# Altium PCB miniquad_713.PcbDoc
Units mm, origin at the board's own origin, x right, y up, seen from the top; angles counter-clockwise.
Board outline 67.26 x 88.15 mm, 2 copper layers (Top Layer, Bottom Layer); 40 components, 31 nets, 163 pads, 39 vias.
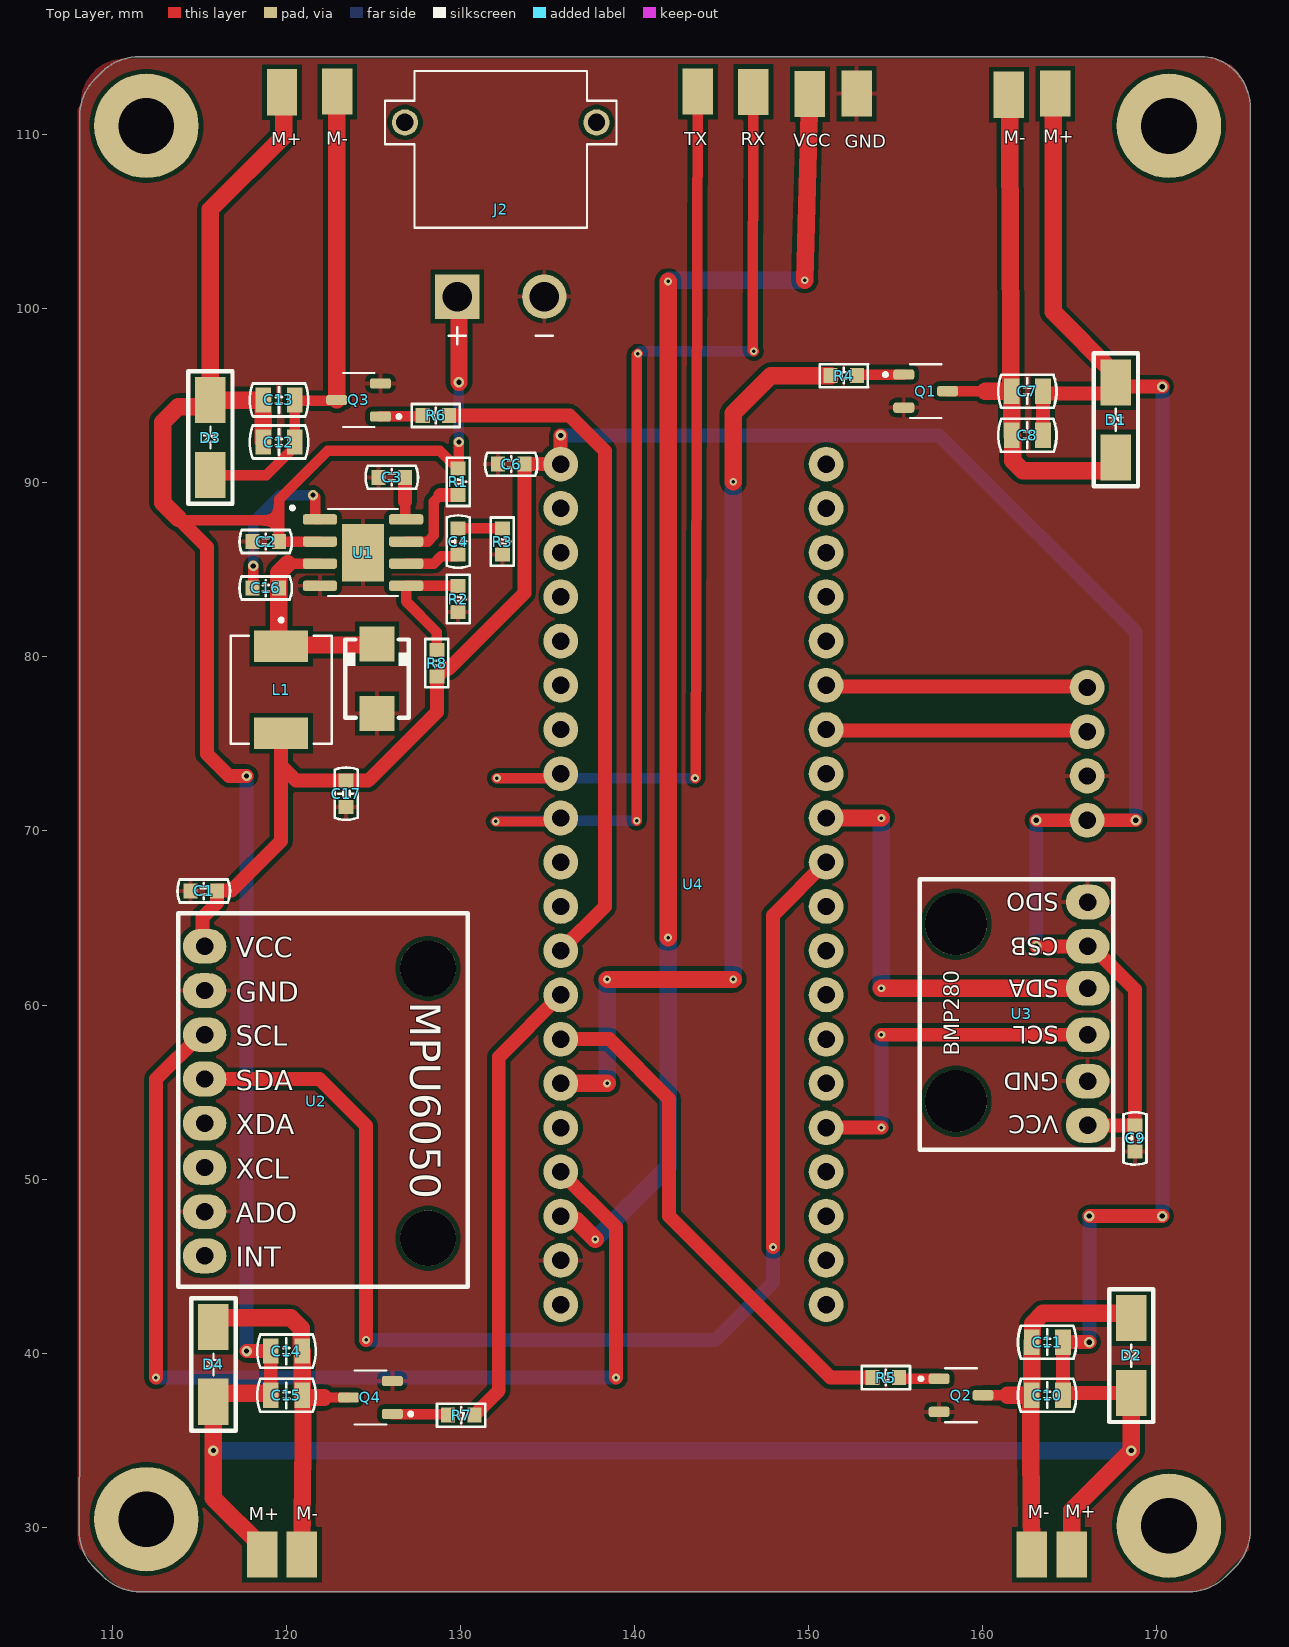
[diagram p0: Top Layer view]
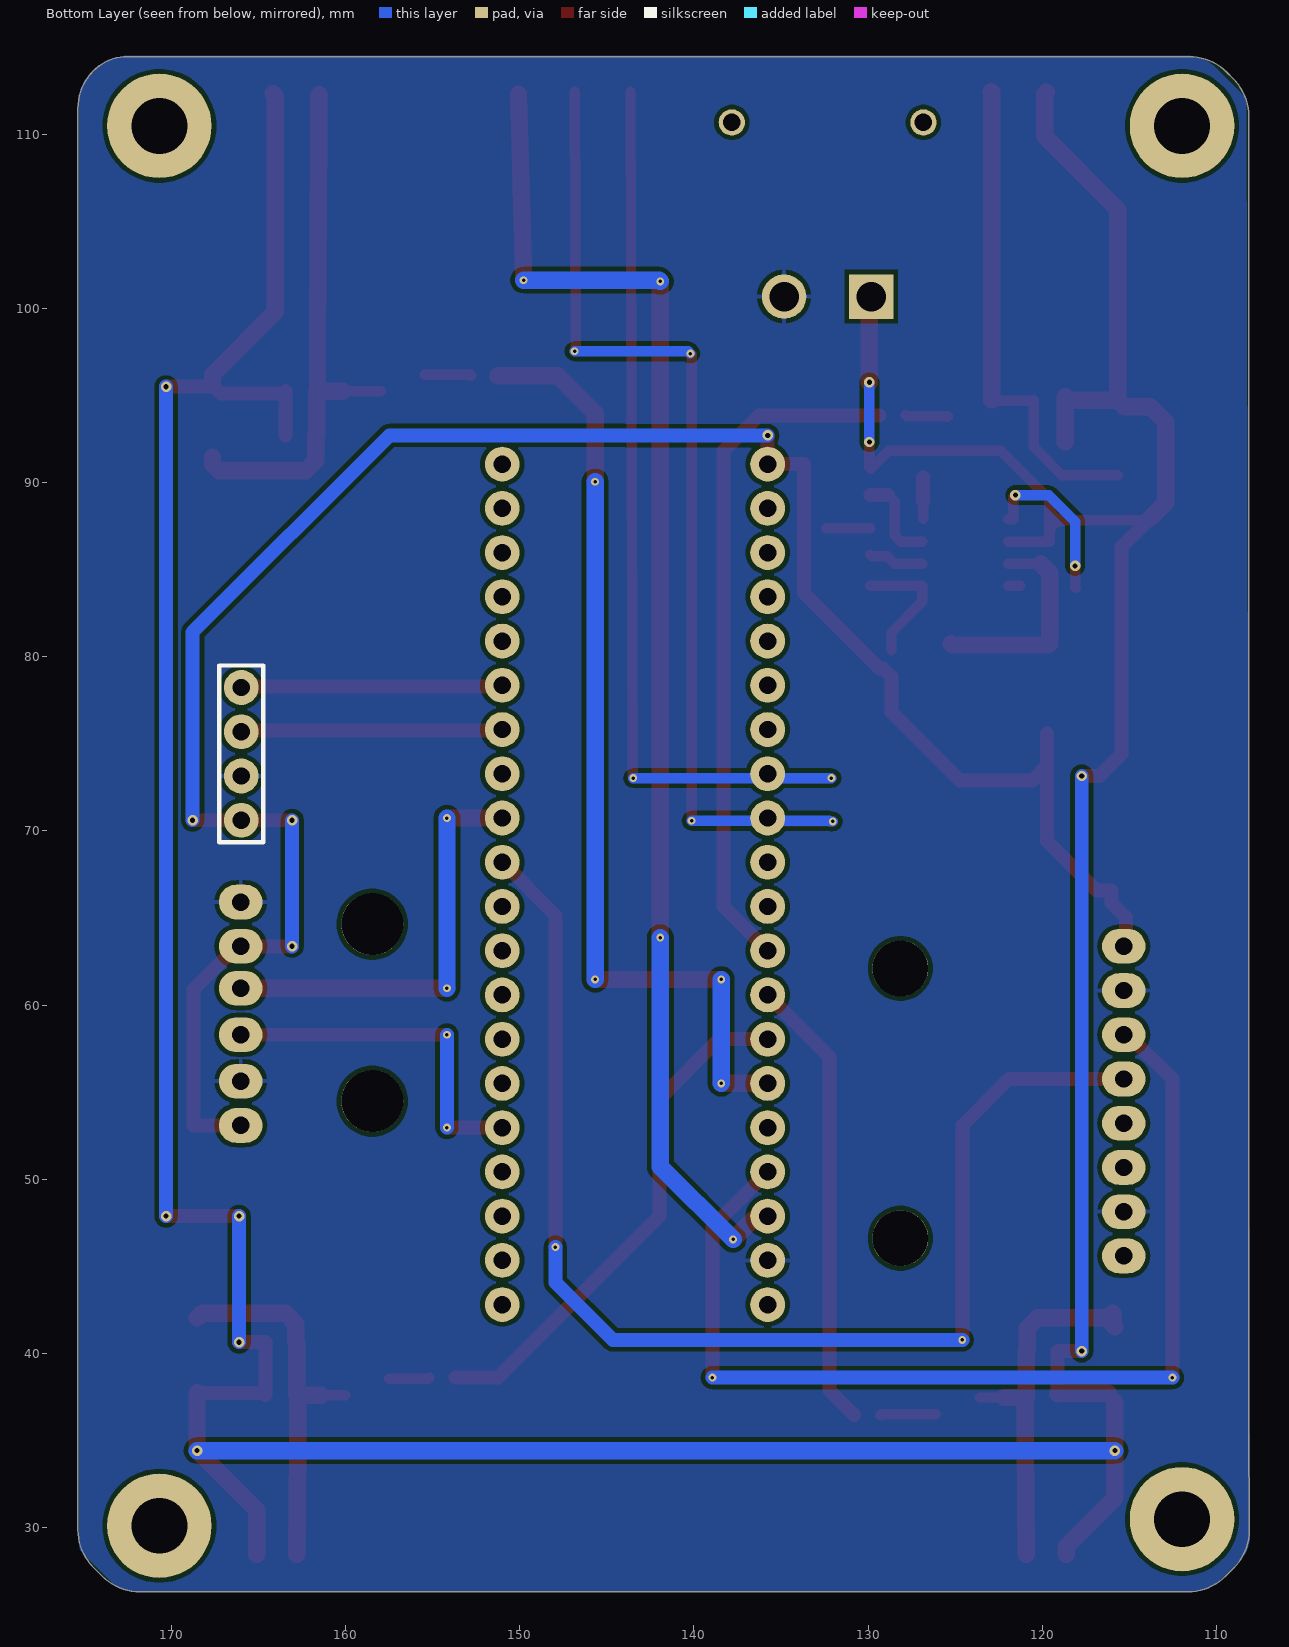
[diagram p1: Bottom Layer view, seen from below]
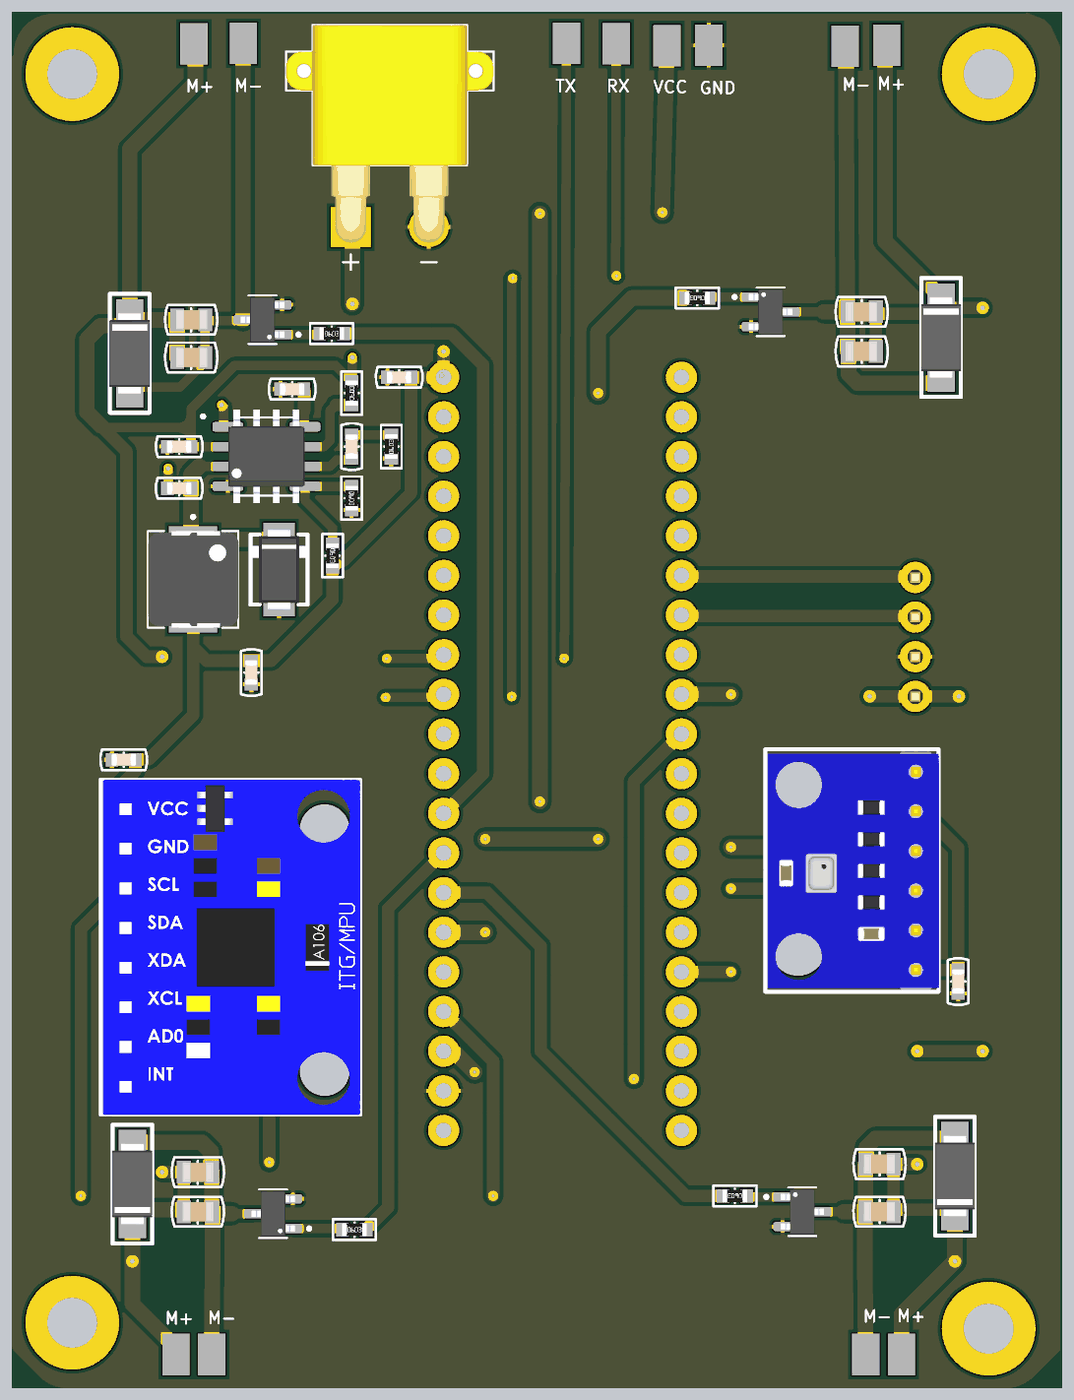
[diagram p2: 3D render of the assembled board from above, using the file's embedded part models]

## Layer stack, top to bottom
Top Solder: solder mask 0.0102, Solder Resist, Dk 3.5
Top Layer: signal copper 0.0356
Dielectric 1: dielectric 0.32, FR-4, Dk 4.8
Bottom Layer: signal copper 0.0356
Bottom Solder: solder mask 0.0102, Solder Resist, Dk 3.5

## Board outline
108.11,29.83 108.11,32.86 108.14,32.932 108.14,111.03 cw(c111.206,111.03) 109.038,113.198 109.402,113.562 cw(c111.57,111.394) 111.57,114.46 172.512,114.46 cw(c172.512,111.688) 174.472,113.648 cw(c172.304,111.48) 175.37,111.48 175.37,29.87 cw(c172.304,29.87) 174.472,27.702 173.978,27.208 cw(c171.81,29.376) 171.81,26.31 111.63,26.31 cw(c111.63,29.376) 109.462,27.208 109.008,27.662 cw(c111.176,29.83)

## Design rules (kind name [scope] priority, off if disabled: settings)
Clearance [All] p1: gap=0.254 ignorepadtopadclearanceinfootprint=FALSE
PolygonConnect [All] p1: connectstyle=Relief reliefconductorwidth=0.254 reliefentries=4 polygonreliefangle="90 Angle" airgapwidth=0.254
RoutingVias [All] p1: holewidth=0.2 width=0.45 viastyle="Through Hole" minholewidth=0.2 minwidth=0.45 maxholewidth=0.2 maxwidth=0.45
SolderMaskExpansion [All] p1: expansion=0.102 istentingtop=FALSE
Width [All] p1: maxlimit=1.2 minlimit=0.254 preferedwidth=0.254
30 further rules are at their usual default settings.

## Components (designator, comment, footprint, x,y, rotation, side; value= is the part's Value field where it differs from the comment)
C1 "100nF" "CAPACITOR 0603" 115.268,66.548 r0 top
C2 "10uF/25V" "CAPACITOR 0603" 118.824,86.614 r180 top
C3 "0.1uF" "CAPACITOR 0603" 126.063,90.297 r180 top
C4 "3.9nF" "CAPACITOR 0603" 129.873,86.614 r90 top
C6 "100nF" "CAPACITOR 0603" 132.921,91.059 r180 top
C7 "100nF" "CAPACITOR 0805" 162.56,95.25 r0 top
C8 "47uF" "CAPACITOR 0805" 162.56,92.71 r0 top
C9 "100nF" "CAPACITOR 0603" 168.74,52.34 r90 top
C10 "100nF" "CAPACITOR 0805" 163.703,37.592 r0 top
C11 "47uF" "CAPACITOR 0805" 163.703,40.64 r0 top
C12 "100nF" "CAPACITOR 0805" 119.586,92.329 r180 top
C13 "47uF" "CAPACITOR 0805" 119.586,94.742 r180 top
C14 "100nF" "CAPACITOR 0805" 120.015,40.132 r180 top
C15 "47uF" "CAPACITOR 0805" 120.015,37.592 r180 top
C16 "10nF" "CAPACITOR 0603" 118.824,83.947 r0 top
C17 "22uF/6.3V" "CAPACITOR 0603" 123.444,72.136 r90 top
D1 "SS14" DIODE_SMA 167.64,93.599 r0 top
D2 "SS14" DIODE_SMA 168.529,39.878 r180 top
D3 "SS14" DIODE_SMA 115.649,92.583 r0 top
D4 "SS14" DIODE_SMA 115.824,39.37 r180 top
J1 "B130" SMA 125.222,78.74 r270 top
J2 "XT30PW-M" AMASS_XT30PW-M 132.32,110.68 r0 top
J3 "MALE-2.54-4P" MALE-2.54-4P 165.989,74.422 r180 bottom
L1 "10uH/4A" "CUON CAM SMD 0530" 119.713,78.105 r270 top
Q1 "AO3400A" SOT95P280X125-3N 156.718,95.25 r0 top
Q2 "AO3400A" SOT95P280X125-3N 158.75,37.592 r0 top
Q3 "AO3400A" SOT95P280X125-3N 124.158,94.742 r180 top
Q4 "AO3400A" SOT95P280X125-3N 124.841,37.465 r180 top
R1 "100K" RESISTOR_0603 129.873,90.043 r90 top
R2 "10K 1%" RESISTOR_0603 129.873,83.312 r270 top
R3 "6.8K" RESISTOR_0603 132.413,86.614 r90 top
R4 "100" RESISTOR_0603 152.019,96.139 r180 top
R5 "100" RESISTOR_0603 154.432,38.608 r180 top
R6 "100" RESISTOR_0603 128.594,93.853 r0 top
R7 "100" RESISTOR_0603 130.048,36.449 r0 top
R8 "26.1K 1%" RESISTOR_0603 128.651,79.629 r270 top
U1 "MP2307DN-LF-Z" SOIC127P600X170-9N 124.412,85.979 r0 top
U2 "MPU6050" MPU6050 122.11,54.546 r270 top
U3 "BMP280" BMP280 161.925,59.436 r90 top
U4 "STM32F411CEU6" STM32F411CEU6 135.763,65.659 r180 top

## Footprints (in the part's own frame and the unit in brackets; to place one, negate y for a bottom-side part, rotate by r counter-clockwise, add the part's x,y. Pads: shape width x height; smd on the part's side, far side on the other; paste and mask are expansions set on the pad)
AMASS_XT30PW-M [mm]
  round 2.55 hole 1.7: N(2.5,-10)
  rect 2.55x2.55 / inner round 2.55 / far side rect 2.55x2.55 hole 1.7: P(-2.5,-10)
  round 1.508 hole 1: S1(5.5,0) S2(-5.5,0)
  silkscreen extent -6.65,-12.75 6.65,2.95, body extent -6.65,-11 6.65,2.95, height 5
BMP280 [mm] "SENSOR ATMOSPHERIC PRESSURE/TEMPERATURE/ALTITUDE"
  oval 2x2.5 hole 1: 1(-6.35,-4.096) 2(-3.81,-4.096) 3(-1.143,-4.096) 4(1.524,-4.096) 5(3.937,-4.096) 6(6.477,-4.096)
  round 3.556 hole 3.556 unplated: ""(-4.953,3.461) ""(5.207,3.461)
  silkscreen extent -7.75,-5.56 7.78,5.56, body extent -7.62,-5.6 7.62,5.4, height 6.07
"CAPACITOR 0603" [mm]
  rect 0.806x0.864 smd: 1(-0.753,0) 2(0.753,0)
  silkscreen extent -1.5,-0.66 1.5,0.66, body extent -0.79,-0.4 0.81,0.4, height 0.81
"CAPACITOR 0805" [mm]
  rect 0.9x1.45 smd: 1(-0.9,0) 2(0.9,0)
  silkscreen extent -1.68,-0.95 1.67,0.95, body extent -1.03,-0.62 0.97,0.63, height 0.61
"CUON CAM SMD 0530" [mm] "CUON CAM SMD 0530"
  rect 1.8x3.1 smd: 1(-2.5,0) 2(2.5,0)
  silkscreen extent -4.1,-2.9 3.1,2.9, body extent -3.1,-2.88 3.1,2.92, height 3
DIODE_SMA [mm] "Diode SMA"
  rect 1.75x2.65 smd: 1(0,-2.15) 2(0,2.15)
  silkscreen extent -1.27,-3.8 1.27,3.82, body extent -1.3,-2.6 1.3,2.6, height 2.2
MALE-2.54-4P [mm]
  round 2 hole 1: 1(0,-3.81) 2(0,-1.27) 3(0,1.27) 4(0,3.81)
  silkscreen extent -1.27,-5.08 1.27,5.07, body extent -1.21,-5.09 1.19,5.07, height 8.36
MPU6050 [mm] "IMU ACCEL/GYRO 3-AXIS I2C"
  oval 2x2.5 hole 1: 1(-8.826,-6.794) 2(-6.286,-6.794) 3(-3.746,-6.794) 4(-1.206,-6.794) 5(1.334,-6.794) 6(3.874,-6.794) 7(6.414,-6.794) 8(8.954,-6.794)
  round 3.2 hole 3.2 unplated: ""(-7.557,6.033) ""(7.937,6.033)
  silkscreen extent -10.73,-8.32 10.73,8.32, body extent -10.73,-8.19 10.77,8.31, height 5.69
RESISTOR_0603 [mm]
  rect 0.806x0.864 smd: 1(-0.753,0) 2(0.753,0)
  silkscreen extent -1.38,-0.66 1.38,0.66, body extent -0.79,-0.4 0.81,0.4, height 0.47
SMA [mm]
  rect 2x2 smd: A(2,0) C(-2,0)
  silkscreen extent -2.25,-1.84 2.25,1.83, body extent -2.6,-1.3 2.6,1.3, height 2.4
SOIC127P600X170-9N [mm]
  rrect50% 1.97x0.6 smd: 1(-2.475,1.905) 2(-2.475,0.635) 3(-2.475,-0.635) 4(-2.475,-1.905) 5(2.475,-1.905) 6(2.475,-0.635) 7(2.475,0.635) 8(2.475,1.905)
  rect 2.41x3.3 smd paste-3: 9(0,0)
  silkscreen extent -4.16,-2.5 2,2.67, body extent -2.45,-3 2.45,3, height 1.7
SOT95P280X125-3N [mm]
  rrect50% 1.21x0.59 smd: 1(-1.255,0.95) 2(-1.255,-0.95) 3(1.255,0)
  silkscreen extent -2.41,-1.55 0.9,1.55, body extent -1.4,-1.45 1.4,1.45, height 1.25
STM32F411CEU6 [mm]
  round 2 hole 1: 41(0,-25.4) 42(0,-22.86) 43(0,-20.32) 44(0,-17.78) 45(0,-15.24) 46(0,-12.7) 47(0,-10.16) 48(0,-7.62) 49(0,-5.08) 50(0,-2.54) 51(0,0) 52(0,2.54) 53(0,5.08) 54(0,7.62) 55(0,10.16) 56(0,12.7) 57(0,15.24) 58(0,17.78) 59(0,20.32) 60(0,22.86) 61(-15.24,22.86) 62(-15.24,20.32) 63(-15.24,17.78) 64(-15.24,15.24) 65(-15.24,12.7) 66(-15.24,10.16) 67(-15.24,7.62) 68(-15.24,5.08) 69(-15.24,2.54) 70(-15.24,0) 71(-15.24,-2.54) 72(-15.24,-5.08) 73(-15.24,-7.62) 74(-15.24,-10.16) 75(-15.24,-12.7) 76(-15.24,-15.24) 77(-15.24,-17.78) 78(-15.24,-20.32) 79(-15.24,-22.86) 80(-15.24,-25.4)

## Part data
C1 C2 C3 C4 C6 C9 C16 C17: library part "CAPACITOR 0603", "Generic Capacitor 0603, 1.6x0.8x0.9mm."
C7 C8 C10 C11 C12 C13 C14 C15: library part "CAPACITOR 0805", "Generic Capacitor 0805, 2x1.25x1.4mm."
D1 D2 D3 D4: "Rectifier Schottky 40V 1A SMA", JLCPCB PN=C2837270, ComponentLink1Description=Datasheet, Digikey PN=SS14-E3/5ATGITR-ND, Mouser PN=512-SS14
J1: library part B130-13-F, "Diode Zener Dual 3.9V 5% 300mW 3Pin", Package="DO-214 Diodes Inc.", Check_prices=https://www.snapeda.com/parts/B130-13-F/Diodes+Inc./view-part/?ref=eda, MF="Diodes Inc.", MP=B130-13-F, SnapEDA_Link=https://www.snapeda.com/parts/B130-13-F/Diodes+Inc./view-part/?ref=snap
J2: "Socket; DC supply; XT30; male; PIN: 2; on PCBs; THT; Colour: yellow", Package=None, Check_prices=https://www.snapeda.com/parts/XT30PW-M/AMASS/view-part/?ref=eda, MF=AMASS, MP=XT30PW-M, SnapEDA_Link=https://www.snapeda.com/parts/XT30PW-M/AMASS/view-part/?ref=snap
J3: "Male Header Connector 2.54mm 4 Pins.", JLCPCB PN=C492403
L1: library part "Cuon Cam SMD 0530", "SMD 0530", Package=None, Availability=Unavailable, MP=FDV0530-H-1R5M=P3, Price=None
Q1 Q2 Q3 Q4: "N-Channel 30 V 5.8A (Ta) 1.4W (Ta) Surface Mount SOT-23", Package=None, Check_prices=https://www.snapeda.com/parts/AO3400A/UMW/view-part/?ref=eda, MF=UMW, MP=AO3400A, SnapEDA_Link=https://www.snapeda.com/parts/AO3400A/UMW/view-part/?ref=snap
R1 R2 R3 R4 R5 R6 R7 R8: library part RESISTOR_0603, "Generic Resistor 0603."
U1: "Buck Switching Regulator IC Positive Adjustable 0.925V 1 Output 3A 8-SOIC (0.154, 3.90mm Width) Exposed Pad", Package="SOIC-8 Monolithic Power", Availability="In Stock", Check_prices=https://www.snapeda.com/parts/MP2307DN-LF-Z/Monolithic+Power+Systems+Inc./view-part/?ref=eda, MF="Monolithic Power", MP=MP2307DN-LF-Z, Price=None, Purchase-URL=https://pricing.snapeda.com/search/part/MP2307DN-LF-Z/?ref=eda, SnapEDA_Link=https://www.snapeda.com/parts/MP2307DN-LF-Z/Monolithic+Power+Systems+Inc./view-part/?ref=snap
U2: "IMU ACCEL/GYRO 3-AXIS I2C", ComponentLink1Description=Datasheet, ComponentLink1URL=https://invensense.tdk.com/wp-content/uploads/2015/02/MPU-6000-Datasheet1.pdf
U3: "SENSOR ATMOSPHERIC PRESSURE/TEMPERATURE/ALTITUDE"

## Free pads (board coordinates)
  round 6 hole 3.2: Holle(111.97,30.48) Holle(111.97,110.48) Holle(170.69,30.099) Holle(170.69,110.48)
  rect 1.75x2.65 smd: ""(118.618,28.448) ""(119.76,112.41) ""(120.904,28.448) ""(122.93,112.45) ""(143.64,112.45) ""(146.83,112.43) ""(150.07,112.31) ""(152.75,112.34) ""(161.5,112.27) ""(162.814,28.448) ""(164.16,112.34) ""(165.1,28.448)

## Via types
v1: diameter 0.45, hole 0.2, Top Layer to Bottom Layer, 22 vias
v2: diameter 0.6, hole 0.3, Top Layer to Bottom Layer, 17 vias

## Nets (pads, with @x,y where several pads share a name; then routed paths per layer and width w, separated by ;. In a path a pad name is that pad's centre, name@x,y a point inside that pad or via, vN(x,y) a via of type N, cw(c..) or ccw(c..) an arc to the next point about the centre after c; other vN are vias at no path point)
+3.3V_BUCK: C1.2 C6.1 C9.2 C17.2 J3.1 L1.2 R8.2 U2.1 U3.1 U3.5 U4.41 | length 124.4
  Top Layer w0.8: U2.1 115.189,63.5 115.189,65.024 116.018,65.853 116.018,66.545 C1.2 116.021,66.577 116.024,66.58 116.872,66.58 119.713,69.421 119.713,73.748 ; L1.2 119.713,73.748 ; C17.2@123.453,72.892 C17.2@123.476,72.892 ; v2(135.636,91.175) 135.763,91.302 v2(135.763,92.71) ; U4.41 C6.1 133.674,83.645 129.354,79.325 129.129,79.325 128.68,78.876 R8.2 128.651,76.835 124.714,72.898 120.563,72.898 119.713,73.748 ; v2(163.068,63.373) U3.5 166.271,63.373 168.74,60.904 C9.2 168.711,53.093 168.704,53.086 U3.1 ; v2(163.068,70.612) J3.1 v2(168.783,70.612)
  Bottom Layer w0.8: v2@135.763,92.699 143.949,92.699 143.963,92.713 157.477,92.713 168.783,81.407 v2(168.783,70.612) ; v2(163.068,63.373) v2(163.068,70.612)
+3.3V_MCU: pad.@150.07,112.31 U4.58 | length 77.9
  Top Layer w1: U4.58 135.954,47.688 136.602,47.688 v1(137.75,46.54) ; v1(141.93,63.87) v1(141.93,101.55) ; v1(149.78,101.62) 149.766,101.634 pad.@150.07,112.31
  Bottom Layer w1: v1(137.75,46.54) 141.93,50.72 v1(141.93,63.87) ; v1(141.93,101.55) 142,101.62 v1(149.78,101.62)
GND: C1.1 C2.2 C3.2 C6.2 C9.1 C17.1 J1.A J2.N J3.2 pad.@152.75,112.34 Q1.2 Q2.2 Q3.2 Q4.2 R2.2 R3.1 U1.4 U1.9 U2.2 U2.7 U3.2 U3.6 U4.59 | length 0.7
  Top Layer w0.6: U1.4@121.252,84.074 U1.4
M+_1: C2.1 C7.2 C8.2 C10.2 C11.2 C12.2 C13.2 C14.2 C15.2 D1.2 D2.2 D3.2 D4.2 J2.P pad.@118.618,28.448 pad.@119.76,112.41 pad.@164.16,112.34 pad.@165.1,28.448 R1.2 U1.2 | length 291.9
  Top Layer w0.6: 113.925,87.83 119.591,87.83 ; U1.2 C2.1 119.591,86.628 119.591,87.83 ; v2(129.921,92.329) 129.921,90.873 129.844,90.796 128.819,91.821 122.38,91.821 119.591,89.032 119.591,87.83
  Top Layer w0.8: 113.808,87.947 115.443,86.312 115.443,74.422 116.713,73.152 v2(117.729,73.152) ; v2(117.729,40.132) C14.2 ; C15.2 119.115,37.669 C14.2@119.115,40.121 ; C8.2 C7.2@163.46,95.173 ; C7.2 C7.2@163.46,95.173 ; C10.2 C10.2@164.603,37.678 ; v2(166.116,40.64) C11.2 C10.2@164.603,37.678 ; v2(166.116,47.879) v2(170.307,47.879) ; D1.2@167.546,95.504 167.165,95.123 163.51,95.123 C7.2@163.46,95.173 ; D1.2@167.64,95.504 v2(170.307,95.504) ; D2.2 164.653,37.728 C10.2@164.603,37.678
  Top Layer w1: 113.808,87.947 112.903,88.852 112.903,93.472 113.792,94.361 115.277,94.361 D3.2 ; D4.2 v2(115.824,34.417) 115.824,31.692 118.618,28.898 pad.@118.618,28.448 ; D4.2@116.199,37.719 119.065,37.719 C15.2@119.115,37.669 ; C13.2@118.682,94.922 118.682,94.737 115.654,94.737 D3.2 ; C12.2 C13.2@118.686,94.737 ; pad.@119.76,112.41 119.86,112.31 119.86,109.89 115.649,105.679 D3.2 ; J2.P cw(c129.576,100.436) 129.921,100.436 v2(129.921,95.758) ; pad.@164.16,112.34 164.04,112.22 164.04,99.799 167.64,96.199 D1.2 ; pad.@165.1,28.448 165.1,30.988 v2(168.529,34.417) D2.2
  Bottom Layer w0.6: v2(129.921,92.329) v2(129.921,95.758)
  Bottom Layer w0.8: v2(117.729,40.132) v2(117.729,73.152) ; v2(166.116,40.64) v2(166.116,47.879) ; v2(170.307,47.879) v2(170.307,95.504)
  Bottom Layer w1: v2(115.824,34.417) v2(168.529,34.417)
M-_1: C12.1 C13.1 D3.1 pad.@122.93,112.45 Q3.3 | length 28.4
  Top Layer w0.6: D3.1 118.865,90.433 120.486,92.054 C12.1 C13.1 120.588,94.742 120.636,94.694 122.555,94.694 122.603,94.742 Q3.3
  Top Layer w1: Q3.3 122.903,112.423 pad.@122.93,112.45
M-_2: C14.1 C15.1 D4.1 pad.@120.904,28.448 Q4.3 | length 21.7
  Top Layer w0.6: 122.174,37.465 Q4.3
  Top Layer w1: D4.1 115.951,41.647 D4.1@115.951,42.285 ; D4.1@115.951,42.291 D4.1@115.951,42.285 ; pad.@120.904,28.448 120.965,34.864 C15.1@120.965,37.465 ; 122.174,37.465 C15.1@120.965,37.465 ; D4.1@115.951,42.285 116.199,42.037 120.269,42.037 120.865,41.441 120.865,40.182 C14.1 C15.1 120.915,37.515 C15.1@120.965,37.465
M-_3: C10.1 C11.1 D2.1 pad.@162.814,28.448 Q2.3 | length 22.1
  Top Layer w0.6: Q2.3 161.417,37.592
  Top Layer w1: 161.417,37.592 C10.1 ; pad.@162.814,28.448 162.753,34.483 162.753,37.542 C10.1 ; D2.1 168.266,42.291 163.439,42.291 162.853,41.705 162.853,40.69 C11.1 C10.1
M-_4: C7.1 C8.1 D1.1 pad.@161.5,112.27 Q1.3 | length 31.5
  Top Layer w0.6: Q1.3 160.147,95.25
  Top Layer w1: 160.147,95.25 C7.1 ; pad.@161.5,112.27 161.55,112.22 161.55,109.89 161.61,98.105 161.61,95.3 C7.1 ; D1.1 167.64,91.053 167.265,90.678 162.296,90.678 161.71,91.264 161.71,92.66 C8.1 C7.1
NetC3_1: C3.1 U1.8 | length 2.4
  Top Layer w0.6: 126.825,88.9 126.837,88.888 U1.8@126.837,87.934
  Top Layer w0.8: C3.1@126.813,90.3 C3.1 ; 126.825,88.9 126.834,88.909 C3.1@126.834,90.297
NetC4_1: C4.1 U1.6 | length 3.2
  Top Layer w0.6: U1.6 128.476,85.344 128.89,85.758 129.77,85.758 C4.1
NetC4_2: C4.2 R3.2 | length 2.5
  Top Layer w0.6: C4.2 R3.2
NetC16_1: C16.1 U1.1 | length 9.6
  Top Layer w0.6: C16.1 118.11,83.986 v2(118.11,85.217) ; v2(121.539,89.281) 121.667,89.153 121.667,87.884 U1.1
  Bottom Layer w0.6: v2(118.11,85.217) 118.11,87.757 119.634,89.281 v2(121.539,89.281)
NetC16_2: C16.2 J1.C L1.1 U1.3 | length 12.4
  Top Layer w0.6: 120.094,85.344 U1.3
  Top Layer w1: 120.094,85.344 119.577,84.827 C16.2 119.577,80.741 119.646,80.673 125.154,80.673 J1.C
NetQ1_1: Q1.1 R4.1 | length 2.7
  Top Layer w0.6: R4.1 152.833,96.2 Q1.1
NetQ2_1: Q2.1 R5.1 | length 2.3
  Top Layer w0.6: R5.1 155.251,38.542 Q2.1
NetQ3_1: Q3.1 R6.1 | length 2.5
  Top Layer w0.6: Q3.1 125.418,93.797 127.785,93.797 R6.1
NetQ4_1: Q4.1 R7.1 | length 3.2
  Top Layer w0.6: Q4.1 129.229,36.515 R7.1
NetR1_1: R1.1 U1.7 | length 5.2
  Top Layer w0.6: U1.7 128.125,86.614 128.476,86.965 128.476,88.9 128.857,89.281
  Top Layer w0.8: 128.857,89.281 128.863,89.287 129.87,89.287 R1.1
NetR2_1: R2.1 R8.1 U1.5 | length 7.4
  Top Layer w0.6: R8.1 128.651,81.407 126.887,83.171 U1.5 127.572,84.074 127.581,84.065 R2.1
PWM_1: R6.2 U4.52 | length 39.6
  Top Layer w0.8: R6.2 136.271,93.853 138.303,91.821 138.303,65.659 U4.52
PWM_2: R7.2 U4.53 | length 26.2
  Top Layer w0.8: R7.2 130.801,36.478 130.804,36.481 130.833,36.481 132.207,37.855 132.207,57.023 U4.53
PWM_3: R5.2 U4.54 | length 29.9
  Top Layer w0.8: U4.54 138.557,58.039 141.986,54.61 141.986,47.879 151.257,38.608 R5.2
PWM_4: R4.2 U4.55 | length 54.9
  Top Layer w1: U4.55 v1(138.43,55.499) ; v1(138.43,61.468) v1(145.669,61.468) ; v1(145.669,90.043) 145.669,93.98 147.828,96.139 R4.2
  Bottom Layer w1: v1(138.43,55.499) v1(138.43,61.468) ; v1(145.669,61.468) v1(145.669,90.043)
RX: pad.@146.83,112.43 U4.49 | length 60.4
  Top Layer w0.6: v1(132.03,70.54) 135.564,70.54 U4.49 ; v1(140.13,70.58) 140.13,97.34 v1(140.2,97.41) ; pad.@146.83,112.43 146.79,97.6 v1(146.85,97.54)
  Bottom Layer w0.6: v1(132.03,70.54) 132.18,70.54 132.22,70.58 v1(140.13,70.58) ; v1(140.2,97.41) 140.33,97.54 v1(146.85,97.54)
SCL_1: J3.3 U4.74 | length 15
  Top Layer w0.8: U4.74 151.066,75.755 165.925,75.755 J3.3
SCL_2: U2.3 U4.57 | length 60.5
  Top Layer w0.8: v1(112.522,38.608) 112.522,55.749 115.066,58.293 U2.3 ; U4.57 138.938,47.244 v1(138.938,38.608)
  Bottom Layer w0.8: v1(112.522,38.608) v1(138.938,38.608)
SCL_3: U3.3 U4.65 | length 20.4
  Top Layer w0.8: U4.65 v1(154.178,52.959) ; v1(154.178,58.293) U3.3
  Bottom Layer w0.8: v1(154.178,52.959) v1(154.178,58.293)
SDA_1: J3.4 U4.75 | length 15
  Top Layer w0.8: U4.75 151.066,78.295 165.925,78.295 J3.4
SDA_2: U2.4 U4.71 | length 72.8
  Top Layer w0.8: U2.4 121.92,55.753 124.587,53.086 v1(124.587,40.767) ; v1(147.955,46.101) 147.955,65.151 U4.71
  Bottom Layer w0.8: v1(124.587,40.767) 144.653,40.767 147.955,44.069 v1(147.955,46.101)
SDA_3: U3.4 U4.72 | length 24.8
  Top Layer w1: U4.72 v1(154.178,70.739) ; v1(154.178,60.96) U3.4
  Bottom Layer w1: v1(154.178,60.96) v1(154.178,70.739)
TX: pad.@143.64,112.45 U4.48 | length 54.6
  Top Layer w0.6: v1(132.1,73.03) 135.514,73.03 U4.48 ; v1(143.48,73.03) 143.51,73.06 pad.@143.64,112.45
  Bottom Layer w0.6: v1(132.1,73.03) v1(143.48,73.03)
pads on no net: J2.S1 J2.S2 U2. U2.5 U2.6 U2.8 U3. U4.42 U4.43 U4.44 U4.45 U4.46 U4.47 U4.50 U4.51 U4.56 U4.60 U4.61 U4.62 U4.63 U4.64 U4.66 U4.67 U4.68 U4.69 U4.70 U4.73 U4.76 U4.77 U4.78 U4.79 U4.80

## Polygon pours and split planes (outlines as drawn)
GND on Top Layer "GND_L01_P000" (solid, remove dead copper, pour order 0): 175.26,28.73 173.564,27.034 cw(c171.768,28.83) 171.768,26.29 111.672,26.29 cw(c111.672,28.83) 109.876,27.034 108.32,28.59 cw(c108.996,29.266) 108.04,29.266 108.04,111.301 cw(c108.689,111.301) 108.23,111.76 108.23,111.81 cw(c110.77,111.81) 110.77,114.35 173.04,114.35 cw(c173.162,114.228) 173.285,114.35 173.564,114.25 174.27,113.97 174.678,113.562 175.26,112.294
GND on Bottom Layer "GND_L02_P001" (solid, remove dead copper, pour order 1): 108.29,112.08 109.966,113.756 cw(c111.762,111.96) 111.762,114.5 172.468,114.5 cw(c172.468,111.96) 174.264,113.756 174.81,113.21 cw(c173.627,112.027) 175.3,112.027 175.3,29.013 cw(c174.617,29.013) 175.1,28.53 173.409,26.839 cw(c172.18,28.068) 172.18,26.33 111.482,26.33 cw(c111.482,28.87) 109.686,27.074 108.677,28.083 cw(c110.094,29.5) 108.09,29.5

## Silkscreen, mask and mechanical layers (free items; w line width, h text height)
Top Overlay:
  text "M+" at 163.477,109.517 h0.76
  text "M-" at 161.217,109.457 h0.76
  text "M-" at 122.287,109.387 h0.76
  text "M+" at 119.157,109.357 h0.76
  text "TX" at 142.857,109.357 h0.76
  text "RX" at 146.107,109.357 h0.76
  text "VCC" at 149.117,109.297 h0.76
  text "GND" at 152.087,109.237 h0.76
  text "M+" at 164.737,30.557 h0.76
  text "M-" at 162.567,30.527 h0.76
  text "M-" at 120.567,30.447 h0.76
  text "M+" at 117.837,30.417 h0.76
Mechanical 1:
  the board outline again, w1

## Text inside footprints (layer, text, board x,y; h text height)
U2: Top Overlay "ADO" at 117.094,47.498 h1.14; Top Overlay "XCL" at 117.094,50.038 h1.14; Top Overlay "XDA" at 117.094,52.578 h1.14; Top Overlay "SDA" at 117.094,55.118 h1.14; Top Overlay "SCL" at 117.094,57.658 h1.14; Top Overlay "GND" at 117.094,60.198 h1.14; Top Overlay "VCC" at 117.094,62.738 h1.14; Top Overlay "INT" at 117.094,44.958 h1.14
U3: Top Overlay "VCC" at 164.357,53.645 h1 r180; Top Overlay "GND" at 164.37,56.126 h1 r180; Top Overlay "SCL" at 164.37,58.793 h1 r180; Top Overlay "SDA" at 164.37,61.46 h1 r180; Top Overlay "CSB" at 164.37,63.873 h1 r180; Top Overlay "SDO" at 164.37,66.413 h1 r180